# Altium PCB DS157-1.2-C心率传感器.PcbDoc
Units mm, origin at the board's own origin, x right, y up, seen from the top; angles counter-clockwise.
Board outline 20.7 x 30.8 mm, 2 copper layers (Top Layer, Bottom Layer); 35 components, 43 nets, 93 pads, 35 vias.
Unrouted connection lines stored in the file: 12.
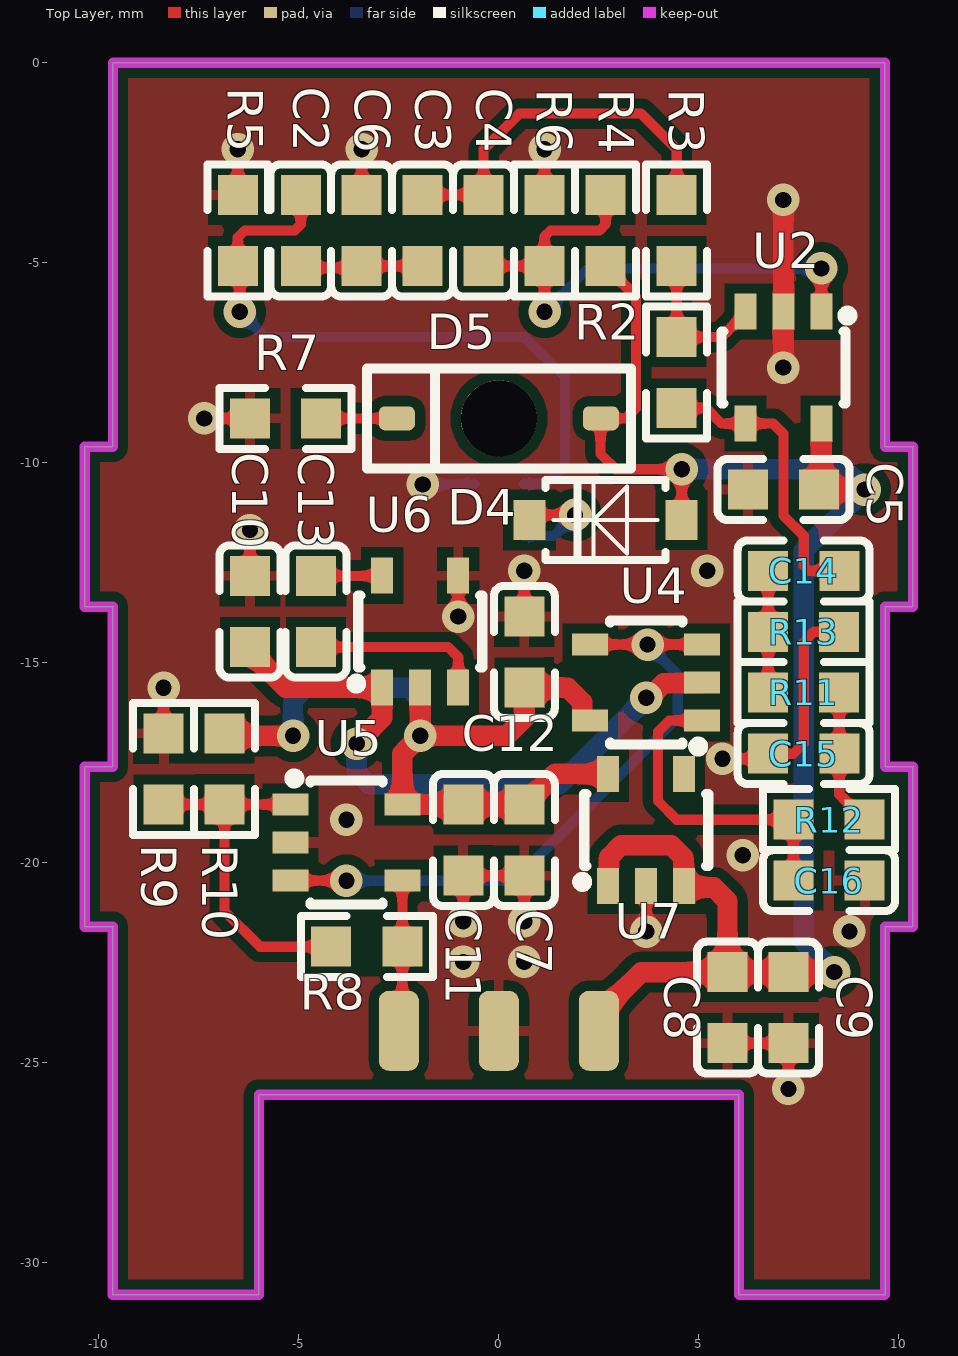
[diagram p0: Top Layer view]
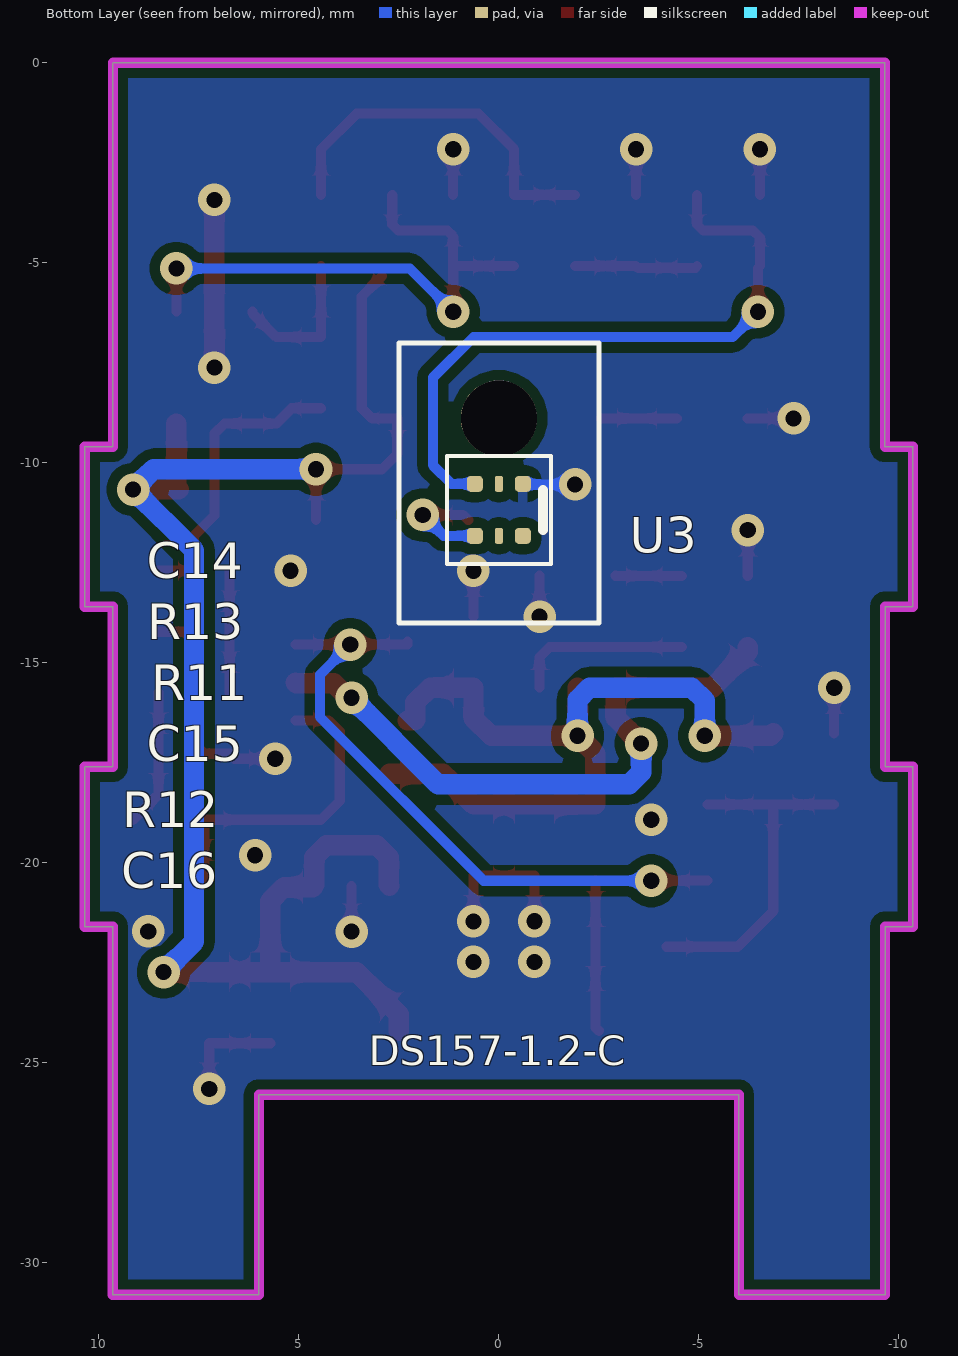
[diagram p1: Bottom Layer view, seen from below]
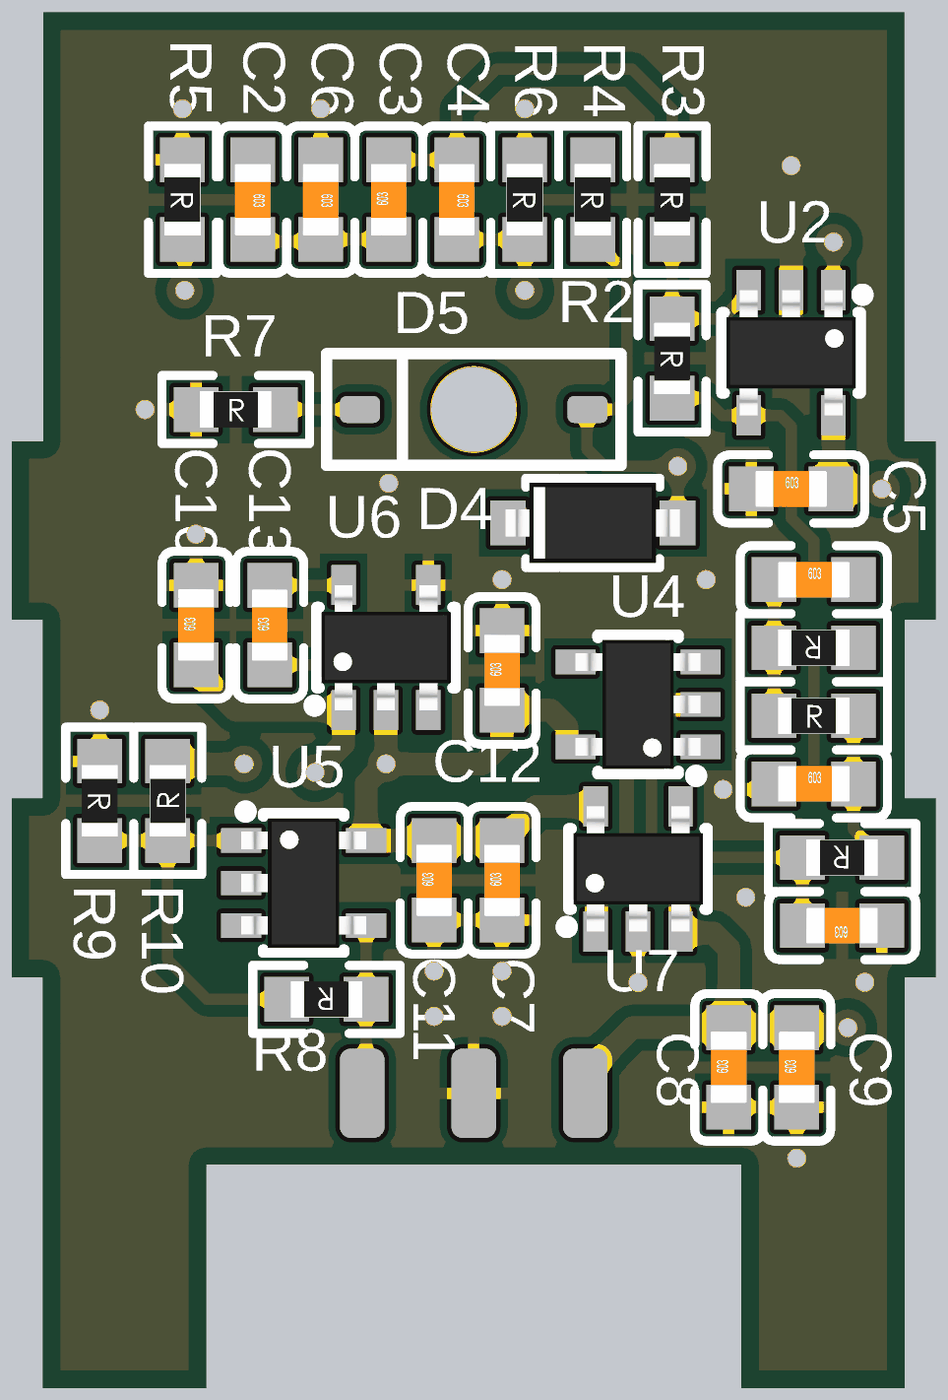
[diagram p2: 3D render of the assembled board from above, using the file's embedded part models]

## Layer stack, top to bottom
Top Solder: solder mask 0.0102, Solder Resist, Dk 3.5
Top Layer: signal copper 0.0356
Dielectric 1: dielectric 0.32, FR-4, Dk 4.8
Bottom Layer: signal copper 0.0356
Bottom Solder: solder mask 0.0102, Solder Resist, Dk 3.5

## Board outline
-9.654,-30.8 -9.654,-21.6 -10.352,-21.6 -10.352,-17.6 -9.654,-17.6 -9.654,-13.6 -10.352,-13.6 -10.352,-9.6 -9.65,-9.6 -9.65,0 9.65,0 9.65,-9.6 10.352,-9.6 10.352,-13.6 9.654,-13.6 9.654,-17.6 10.352,-17.6 10.352,-21.6 9.654,-21.6 9.654,-30.8 6,-30.8 6,-25.8 -6,-25.8 -6,-30.8

## Design rules (kind name [scope] priority, off if disabled: settings)
Clearance [All] p1: gap=0.254 ignorepadtopadclearanceinfootprint=FALSE except(0: Arc-Hole Track-Hole SMDPad-Hole THPad-Hole Via-Hole Fill-Hole Poly-Hole Region-Hole Text-Hole)
PolygonConnect [All] p1: connectstyle=Relief reliefconductorwidth=0.254 reliefentries=4 polygonreliefangle="90 Angle" airgapwidth=0.254
RoutingVias [All] p1: holewidth=0.711 width=1.27 viastyle="Through Hole" minholewidth=0.711 minwidth=1.27 maxholewidth=0.711 maxwidth=1.27
SolderMaskExpansion [All] p1: expansion=0.102 istentingtop=FALSE
Width [All] p1: maxlimit=2.54 minlimit=0.254 preferedwidth=0.254
30 further rules are at their usual default settings.

## Components (designator, comment, footprint, x,y, rotation, side; value= is the part's Value field where it differs from the comment)
C2 "SMDCAP00012" 0603CAP -4.953,-4.191 r270 top value=4.7uF
C3 "SMDCAP00012" 0603CAP -1.905,-4.191 r90 top value=4.7uF
C4 "MLCC 2.2uF 25V ±10％ 0603" 0603CAP -0.381,-4.191 r270 top value=2.2uF
C5 "SMDCAP00016" 0603CAP 7.112,-10.668 r0 top value=10uF
C6 "SMDCAP00012" 0603CAP -3.429,-4.191 r270 top value=4.7uF
C7 "SMDCAP00016" 0603CAP 0.635,-19.433 r90 top value=10uF
C8 "SMDCAP00016" 0603CAP 5.715,-23.622 r90 top value=10uF
C9 "SMDCAP00013" 0603CAP 7.239,-23.622 r90 top value=100nF
C10 "MLCC 3.3uF 50V ±10％ 0603" 0603CAP -6.223,-13.716 r90 top value=3.3uF
C11 "SMDCAP00013" 0603CAP -0.889,-19.432 r90 top value=100nF
C12 "MLCC 3.3uF 50V ±10％ 0603" 0603CAP 0.635,-14.732 r90 top value=3.3uF
C13 "MLCC 3.3uF 50V ±10％ 0603" 0603CAP -4.572,-13.717 r90 top value=3.3uF
C14 "SMDCAP00016" 0603CAP 7.62,-12.7 r0 top value=10uF
C15 "SMDCAP00015" 0603CAP 7.62,-17.272 r0 top value=1uF
C16 "SMDCAP00015" 0603CAP 8.255,-20.447 r180 top value=1uF
D4 "DIPDIODE02001" SOD-123 2.667,-11.43 r180 top value=1N4148
D5 "Chip 翠绿LED 0603" TR10 0,-8.89 r0 top locked value=GREEN
R2 "SMDRES00090" 0603RES 4.445,-7.747 r270 top value=3.3M
R3 "SMDRES00056" 0603RES 4.445,-4.191 r270 top value=10K
R4 "SMDRES00071" 0603RES 2.667,-4.191 r270 top value=100K
R5 "SMDRES00049" 0603RES -6.528,-4.191 r270 top value=5.1K
R6 "SMDRES00071" 0603RES 1.143,-4.191 r270 top value=100K
R7 "SMDRES00027" 0603RES -5.334,-8.89 r0 top value=470R
R8 "Chip 51K 1/16W ±1％ 0603" 0603RES -3.302,-22.098 r180 top value=51K
R9 "SMDRES00043" 0603RES -8.382,-17.653 r270 top value=2.2K
R10 "SMDRES00056" 0603RES -6.858,-17.653 r90 top value=10K
R11 "SMDRES00056" 0603RES 7.62,-15.748 r0 top value=10K
R12 "SMDRES00056" 0603RES 8.255,-18.923 r180 top value=10K
R13 "SMDRES00043" 0603RES 7.62,-14.224 r180 top value=2.2K
U2 "DIPIC000023" SOT23-5 7.112,-7.62 r180 top value=LMV321
U3 "APDS-9008" APDS-9008-020 0,-11.176 r0 bottom locked
U4 "DIPIC000023" SOT23-5 3.683,-15.494 r90 top value=LMV321
U5 "DIPIC000023" SOT23-5 -3.813,-19.492 r270 top value=LMV321
U6 "SGM3206" SOT23-5 -1.966,-14.221 r0 top value=丝印SL7NL
U7 "ME6211C18M5G-N" SOT23-5 3.683,-19.177 r0 top

## Footprints (in the part's own frame and the unit in brackets; to place one, negate y for a bottom-side part, rotate by r counter-clockwise, add the part's x,y. Pads: shape width x height; smd on the part's side, far side on the other; paste and mask are expansions set on the pad)
0603CAP [mm]
  rect 1x1 smd: 1(-0.889,0) 2(0.89,0)
  silkscreen extent -1.65,-0.76 1.65,0.76, body extent -0.8,-0.4 0.8,0.4, height 0.3
0603RES [mm]
  rect 1x1 smd: 1(-0.889,0) 2(0.889,0)
  silkscreen extent -1.65,-0.76 1.65,0.76, body extent -0.8,-0.41 0.8,0.41, height 0.51
APDS-9008-020 [mm]
  rrect50% 0.4x0.4 smd: 1(0.6,0.65) 3(-0.6,0.65) 4(-0.6,-0.65) 6(0.6,-0.65)
  rrect50% 0.2x0.4 smd: 2(0,0.65) 5(0,-0.65)
  silkscreen extent -1.3,-1.35 1.3,1.35
SOD-123 [mm]
  rect 0.8x1 smd: 1(-1.9,0) 2(1.9,0)
  silkscreen extent -1.5,-1 1.5,1, body extent -1.95,-0.9 1.95,0.9, height 1.18
SOT23-5 [mm] "SOT-23/SC-74A; 5 Leads; Body 3.1 x 3 mm, inc. leads (LxW max)"
  rect 0.55x0.9 smd: 1(-0.95,-1.4) 2(0,-1.4) 3(0.95,-1.4) 4(0.95,1.4) 5(-0.95,1.4)
  silkscreen extent -1.7,-1.4 1.55,0.9, body extent -1.45,-1.4 1.45,1.4, height 1.45
TR10 [mm]
  rrect50% 0.9x0.6 smd: 1(2.55,0) 2(-2.55,0)
  round 1.9 hole 1.9: ""(0,0)
  silkscreen extent -3.3,-1.25 3.3,1.25

## Part data
C2 C3 C6: library part "MLCC 4.7uF 50V ±10％ 0603", "贴片电容"
C4 C10 C12 C13: "贴片电容"
C5 C7 C8 C14: library part "MLCC 10uF 50V ±10％ 0603", "贴片电容"
C9 C11: library part "MLCC 100nF 50V ±10％ 0603", "贴片电容"
C15 C16: library part "MLCC 1uF 50V ±10％ 0603", "贴片电容"
D4: library part 1N4148W, "贴片开关二极管 T4"
D5: library part "Chip LED 0603 翠绿", "贴片LED"
R2: library part "Chip 3.3M 1/16W ±1％ 0603", "贴片电阻"
R3 R10 R11 R12: library part "Chip 10K 1/16W ±1％ 0603", "贴片电阻"
R4 R6: library part "Chip 100K 1/16W ±1％ 0603", "贴片电阻"
R5: library part "Chip 5.1K 1/16W ±1％ 0603", "贴片电阻"
R7: library part "Chip 470R 1/16W ±1％ 0603", "贴片电阻"
R8: "贴片电阻"
R9 R13: library part "Chip 2.2K 1/16W ±1％ 0603", "贴片电阻"
U2 U4 U5: library part LMV321, "稳压芯片"
U6: "SGMICRO(圣邦微) / SGM3206YN5G/TR / SOT-23-5"
U7: "稳压芯片"

## Free pads (board coordinates)
  rrect50% 1x2 smd: 1(2.5,-24.2) 2(0,-24.2) 3(-2.5,-24.2)

## Via types
v1: diameter 0.813, hole 0.406, Top Layer to Bottom Layer, tented both sides, 35 vias

## Nets (pads, with @x,y where several pads share a name; then routed paths per layer and width w, separated by ;. In a path a pad name is that pad's centre, name@x,y a point inside that pad or via, vN(x,y) a via of type N, cw(c..) or ccw(c..) an arc to the next point about the centre after c; other vN are vias at no path point)
ADC0: pad.3 R8.1 U5.4 | length 3.8
  Top Layer w0.254: pad.3 -2.413,-24.113 R8.1 U5.4
ADC1: 
DAC_OUT: 
Dis_blue_EN: 
Dis_green_EN: 
Dis_red_EN: 
GND: C5.1 C6.1 C7.1 C8.1 C9.1 C10.2 C11.1 C12.2 C15.1 C16.1 pad.2 R5.1 R6.1 R7.1 R9.1 R13.1 U2.2 U3.4 U5.2 U6.4 U7.2 | length 27.9
  Top Layer w0.254: R9.1 v1(-8.382,-15.621) ; v1(-7.366,-8.89) R7.1 ; R5.1 v1(-6.528,-2.159) ; C10.2 v1(-6.223,-11.683) ; C6.1 v1(-3.429,-2.159) ; v1(-1.016,-13.843) U6.4 ; v1(-0.889,-21.464) C11.1 -0.888,-20.322 C7.1 v1(0.635,-21.465) ; C12.2 v1(0.635,-12.699) ; R6.1 v1(1.143,-2.159) ; v1(3.683,-21.72) U7.2 ; v1(5.588,-17.399) 6.604,-17.399 C15.1 7.366,-17.272 7.62,-17.018 7.62,-14.478 7.874,-14.224 R13.1 ; C8.1 C9.1 v1(7.239,-25.654)
  Top Layer w0.508: v1(7.112,-7.62) v1(7.112,-3.429)
  Bottom Layer w0.254: v1(-1.905,-10.541) -0.615,-10.541 U3.4
  other v1: -0.889,-22.479 0.635,-22.479 8.763,-21.717 6.096,-19.812 -3.81,-18.923 5.207,-12.7
I2C1_SCL: 
I2C1_SDA: 
KEY_HOME: 
LED_blue: 
LED_green: 
LED_red: 
NetC2_1: C2.1 R5.2 U3.6 | length 16.6
  Top Layer w0.254: v1(-6.477,-6.223) -6.477,-5.131 R5.2 -6.528,-4.369 -6.35,-4.191 -5.102,-4.191 -4.953,-4.042 C2.1
  Bottom Layer w0.254: v1(-6.477,-6.223) -5.842,-6.858 0.635,-6.858 1.651,-7.874 1.651,-10.058 1.183,-10.526 U3.6
NetC2_2: C2.2 C3.1 C6.2 | length 3.1
  Top Layer w0.254: C2.2 -4.907,-5.127 -3.475,-5.127 C6.2 -3.428,-5.08 C3.1
NetC3_2: C3.2 C4.1 R3.1 | length 9.4
  Top Layer w0.254: C3.2 C4.1 C4.1 -0.381,-2.159 0.508,-1.27 3.556,-1.27 4.445,-2.159 R3.1
NetC4_2: C4.2 R4.1 R6.2 U2.1 | length 14.2
  Top Layer w0.254: C4.2 R6.2 ; v1(1.143,-6.223) v1(1.143,-6.223) R6.2 ; R4.1 2.667,-4.042 2.518,-4.191 1.292,-4.191 1.143,-4.34 R6.2 R6.2 ; U2.1 v1(8.062,-5.141)
  Bottom Layer w0.254: v1(1.143,-6.223) 2.225,-5.141 v1(8.062,-5.141)
NetC13_1: C13.1 U6.3 | length 4.4
  Top Layer w0.254: C13.1 -1.269,-14.606 -1.016,-14.859 U6.3
NetC13_2: C13.2 U6.5 | length 1.7
  Top Layer w0.254: C13.2 -2.922,-12.827 U6.5
NetC14_1: C14.1 R11.1 R13.2 | length 3
  Top Layer w0.254: R11.1 R13.2 C14.1
NetC14_2: C14.2 R2.2 U2.4 | length 7.4
  Top Layer w0.254: R2.2 5.18,-8.636 5.564,-9.02 U2.4 6.861,-9.02 7.112,-9.271 7.112,-11.317 7.62,-11.825 7.62,-12.573 7.747,-12.7 C14.2
NetC15_2: C15.2 R11.2 R12.1 | length 3.4
  Top Layer w0.254: R11.2 8.509,-17.271 C15.2 8.51,-18.289 R12.1
NetC16_2: C16.2 R12.2 U4.1 | length 8.1
  Top Layer w0.254: U4.1 4.257,-16.444 3.977,-16.724 3.977,-18.455 4.445,-18.923 R12.2 C16.2 C16.2
NetD4_2: D4.2 U3.1 | length 2.7
  Top Layer w0.254: D4.2 0.894,-11.303 v1(1.905,-11.303)
  Bottom Layer w0.254: U3.1 1.382,-11.826 v1(1.905,-11.303)
NetD5_2: D5.2 R7.2 | length 1.9
  Top Layer w0.254: R7.2 D5.2
NetR1_1: 
NetR1_2: 
NetR1_3: 
NetR2_1: R2.1 R3.2 U2.3 | length 3.8
  Top Layer w0.254: R3.2 R2.1 5.562,-6.858 6.162,-6.258 U2.3
NetR8_2: R8.2 R9.2 R10.1 U5.1 | length 8.9
  Top Layer w0.254: R9.2 R10.1 ; U5.1 R10.1 ; R8.2 -5.969,-22.098 -6.858,-21.209 R10.1
NetU4_3: U4.3 U4.4 U5.3 | length 16.5
  Top Layer w0.254: U5.3 -5.21,-20.444 -3.813,-20.444 v1(-3.81,-20.447) ; U4.3 v1(3.718,-14.544) U4.4@2.352,-14.544 ; U4.4@2.352,-14.544 2.283,-14.475 U4.4 U4.4@2.352,-14.544
  Bottom Layer w0.254: v1(-3.81,-20.447) 0.381,-20.447 4.47,-16.358 4.47,-15.297 v1(3.718,-14.544)
SPI2_CS: 
SPI2_MISO: 
SPI2_MOSI: 
SPI2_SCK: 
USART2_RXD: 
USART2_TXD: 
VBUS: 
VCC_3V3_MCU: 
VCC_5V: C5.2 C8.2 C9.2 D4.1 D5.1 pad.1 R4.2 U2.5 U7.1 U7.3 | length 42.8
  Top Layer w0.254: R4.2@2.921,-5.334 3.429,-5.842 3.429,-8.636 3.175,-8.89 D5.1 2.54,-8.9 2.54,-9.779 2.921,-10.16 v1(4.572,-10.16) D4.1@4.572,-11.425
  Top Layer w0.508: pad.1 2.5,-23.789 3.556,-22.733 C8.2 ; U7.1 2.754,-20.556 2.754,-19.856 3.052,-19.558 4.314,-19.558 4.612,-19.856 4.612,-20.556 U7.3 4.633,-20.591 4.654,-20.612 5.372,-20.612 5.715,-20.955 C8.2 ; U2.5 8.062,-10.608 C5.2 v1(9.144,-10.668) ; v1(8.383,-22.732) C9.2 C9.2 C8.2
  Bottom Layer w0.508: v1(4.572,-10.16) 8.636,-10.16 v1(9.144,-10.668) 7.62,-12.192 7.62,-21.969 v1(8.383,-22.732)
VCC_+1V8: C7.2 C11.2 C12.1 R10.2 U4.5 U5.5 U6.2 U7.5 | length 21.3
  Top Layer w0.508: R10.2 -6.797,-16.825 v1(-5.146,-16.825) ; U6.2 v1(-1.966,-16.825) ; U4.5 2.108,-16.444 2.087,-16.423 2.087,-15.989 1.719,-15.621 C12.1 0.635,-16.383 0.193,-16.825 v1(-1.966,-16.825) ; U7.5 1.401,-17.777 C7.2 C7.2 C11.2 U5.5 -2.413,-17.272 v1(-1.966,-16.825)
  Bottom Layer w0.508: v1(-5.146,-16.825) -5.146,-15.941 -4.826,-15.621 -2.264,-15.621 -1.966,-15.919 v1(-1.966,-16.825)
VCC_-1V8: C10.1 U4.2 U6.1 | length 16
  Top Layer w0.508: C10.1 -6.223,-14.732 -5.334,-15.621 U6.1 -2.916,-16.378 v1(-3.556,-17.018) ; v1(3.683,-15.875) 3.765,-15.875 4.125,-15.515 5.062,-15.515 U4.2
  Bottom Layer w0.508: v1(-3.556,-17.018) -3.556,-17.736 -3.258,-18.034 1.524,-18.034 v1(3.683,-15.875)
VSS: 
pads on no net: D5. U3.2 U3.3 U3.5 U7.4

## Polygon pours and split planes (outlines as drawn)
GND on Top Layer "NONET_L02_P-001" (solid, remove dead copper, pour order 0): 6,-30.8 9.654,-30.8 9.654,-21.6 10.352,-21.6 10.352,-17.6 9.654,-17.6 9.654,-13.6 10.352,-13.6 10.352,-9.6 9.65,-9.6 9.65,0 -9.65,0 -9.65,-9.6 -10.352,-9.6 -10.352,-13.6 -9.654,-13.6 -9.654,-17.6 -10.352,-17.6 -10.352,-21.6 -9.654,-21.6 -9.654,-30.8 -6,-30.8 -6,-25.8 6,-25.8
GND on Bottom Layer "NONET_L02_P-001" (solid, remove dead copper, pour order 1): 6,-30.8 9.654,-30.8 9.654,-21.6 10.352,-21.6 10.352,-17.6 9.654,-17.6 9.654,-13.6 10.352,-13.6 10.352,-9.6 9.65,-9.6 9.65,0 -9.65,0 -9.65,-9.6 -10.352,-9.6 -10.352,-13.6 -9.654,-13.6 -9.654,-17.6 -10.352,-17.6 -10.352,-21.6 -9.654,-21.6 -9.654,-30.8 -6,-30.8 -6,-25.8 6,-25.8

## Keep-outs
Keep-Out Layer:
  the board outline again, w0.254

## Other copper
Top Layer:
  pour cut-out: -5.917,-18.93 -5.917,-20.971 -5.901,-20.955 -2.817,-20.955 -2.801,-20.971 -2.801,-22.486 -3.167,-22.852 -4.945,-22.852 -4.945,-22.486 -5.722,-21.71 -5.808,-21.71 -6.47,-21.048 -6.47,-19.296 -6.104,-18.93
  pour cut-out: 6.731,-12.7 8.51,-12.7 8.51,-17.27 8.509,-17.271 8.509,-18.288 9.144,-18.923 9.144,-19.685 7.366,-19.685 7.366,-17.907 6.731,-17.272

## Silkscreen, mask and mechanical layers (free items; w line width, h text height)
Bottom Overlay:
  lines w0.127: -2.5,-14 2.5,-14 2.5,-7 -2.5,-7 -2.5,-14
  text "DS157-1.2-C" at 3.251,-25.314 h1.27
Mechanical 1:
  the board outline again, w0.254